# EAGLE board 13472-THAT_1206_Breakout-panel.v10 (EAGLE 7.5.0)
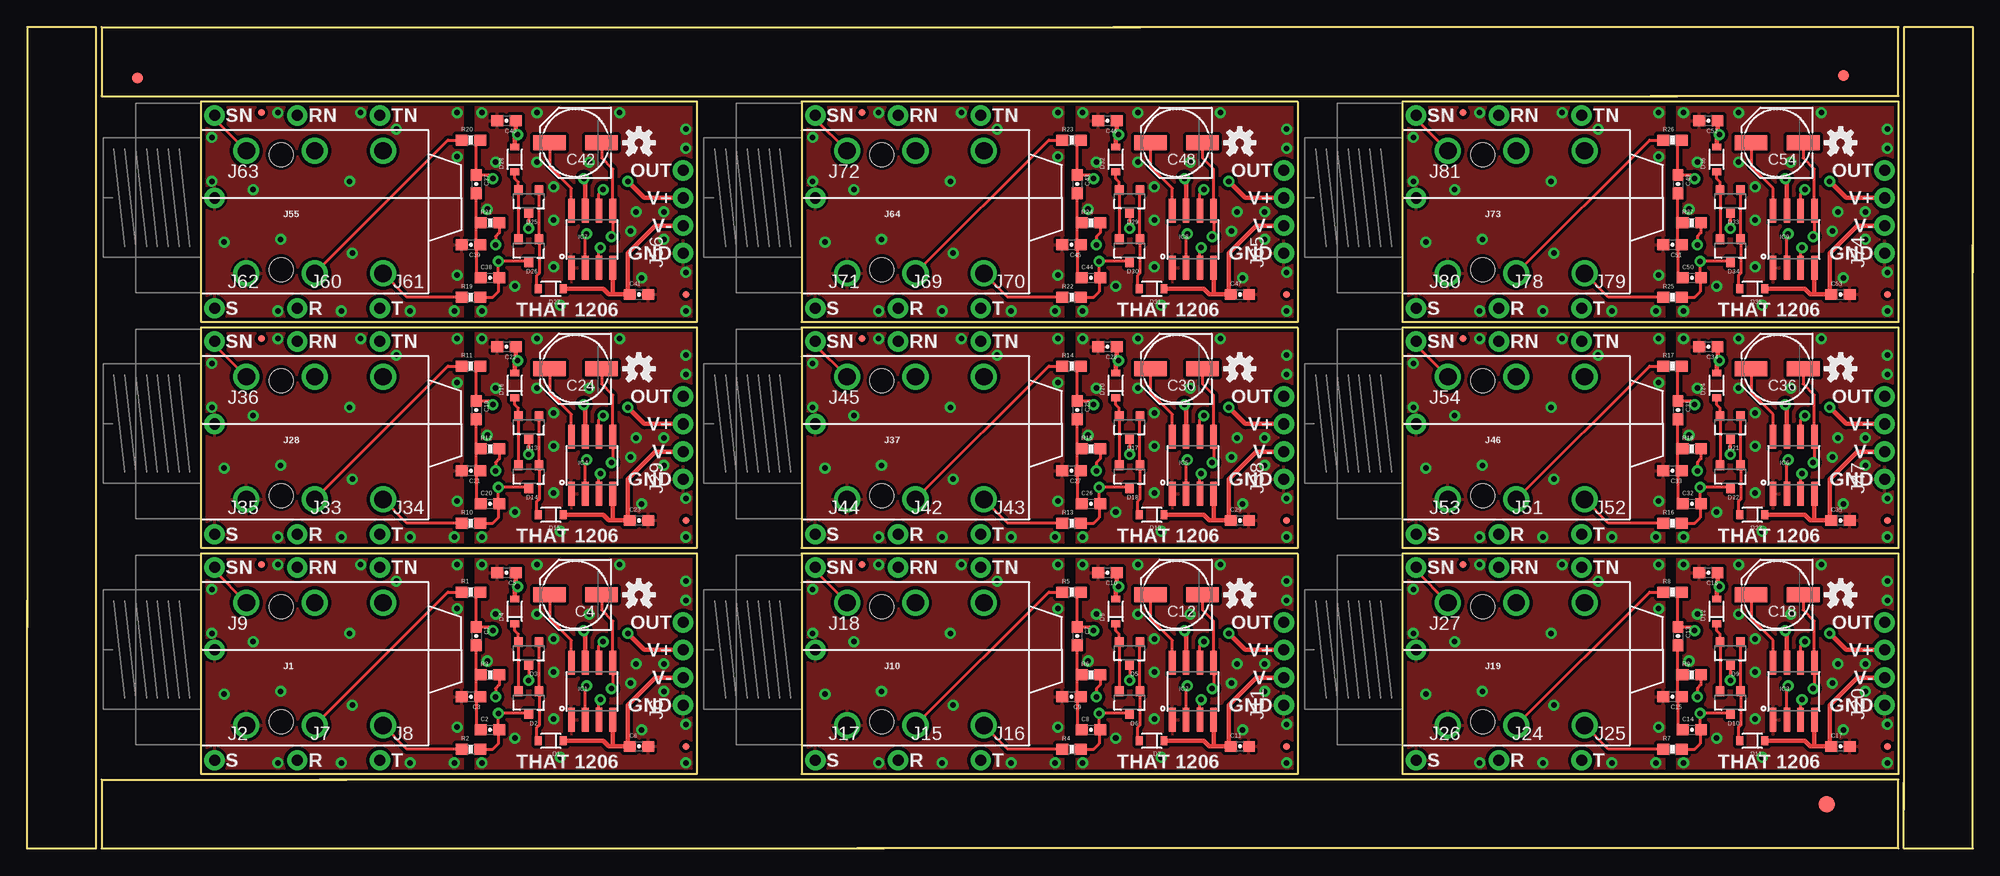
[diagram p0: board, top side]
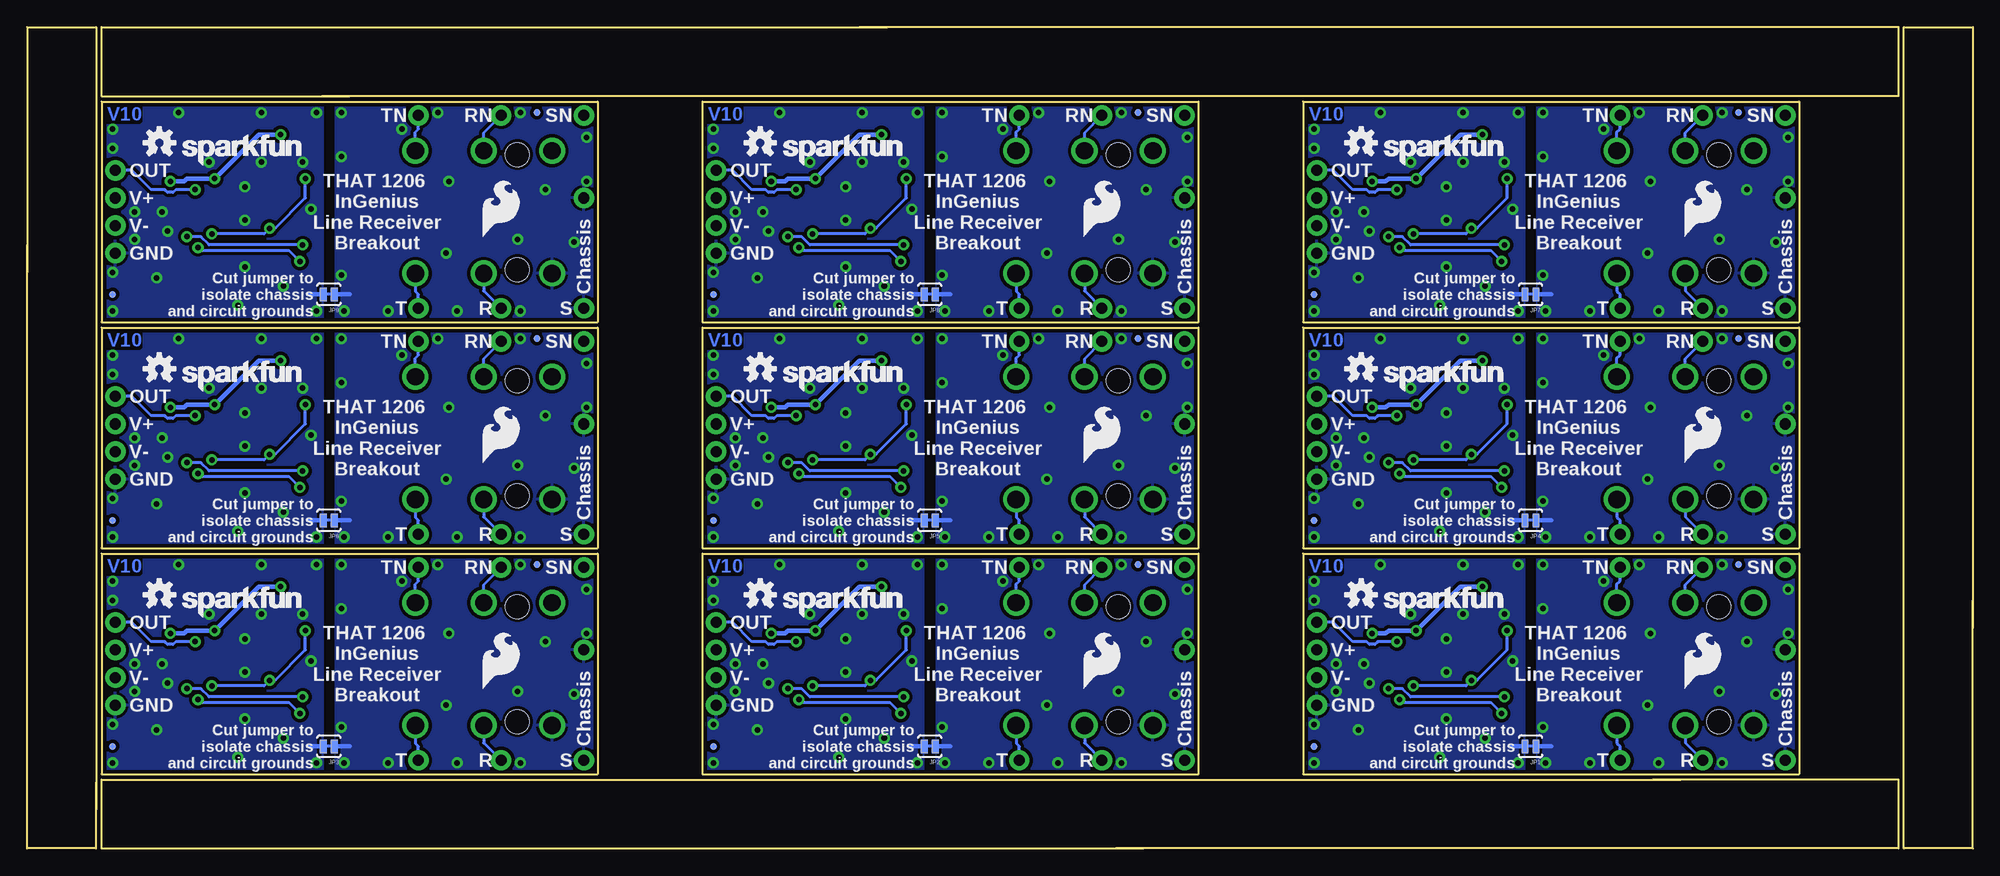
[diagram p1: board, bottom side, seen from below]

Size 179.32 x 75.69 mm. Coordinates in mm from the lower left corner, seen from the top.
Outline: 78.99,0 6.86,0 6.86,6.35 29.46,6.35
Outline: 26.92,6.35 172.47,6.35 172.47,0 76.45,0
Outline: 0,22.86 0,0 6.35,0 6.35,75.69 0,75.69 0,20.32
Outline: 172.97,3.56 172.97,75.69 179.32,75.69 179.32,53.09
Outline: 179.32,55.63 179.32,0 172.97,0 172.97,6.1
Outline: 100.08,75.69 172.47,75.69 172.47,69.34 149.61,69.34
Outline: 152.15,69.34 6.86,69.34 6.86,75.69 102.62,75.69
Outline: 61.72,27.18 16,27.18 16,6.86 61.72,6.86 61.72,27.18
Outline: 117.09,27.18 71.37,27.18 71.37,6.86 117.09,6.86 117.09,27.18
Outline: 172.47,27.18 126.75,27.18 126.75,6.86 172.47,6.86 172.47,27.18
Outline: 61.72,48.01 16,48.01 16,27.69 61.72,27.69 61.72,48.01
Outline: 117.09,48.01 71.37,48.01 71.37,27.69 117.09,27.69 117.09,48.01
Outline: 172.47,48.01 126.75,48.01 126.75,27.69 172.47,27.69 172.47,48.01
Outline: 61.72,68.83 16,68.83 16,48.51 61.72,48.51 61.72,68.83
Outline: 117.09,68.83 71.37,68.83 71.37,48.51 117.09,48.51 117.09,68.83
Outline: 172.47,68.83 126.75,68.83 126.75,48.51 172.47,48.51 172.47,68.83
Copper layers (1*16): Top 0.035mm / dielectric 1.5mm / Bottom 0.035mm
Design rules "SparkFun-2-layer-STANDARD": minimum track width 10mil, minimum drill 20mil, track to track 10mil, track to pad 8mil, pad to pad 8mil, via to via 10mil, smd to smd 8mil, copper to edge 8mil, drill to drill 8mil, minimum pad ring 10mil, minimum via ring 10mil, stop-mask expansion 4mil, vias tented up to drill 25mil, thermal gap 10mil
tRestrict: area 49.7,11.3 to 49.7,12.4; area 49.7,10.5 to 49.7,11.7; area 54.8,11.6 to 54.8,12.7; area 54.8,11.8 to 54.8,13; area 105.1,11.3 to 105.1,12.4; area 105.1,10.5 to 105.1,11.7; area 110.2,11.6 to 110.2,12.7; area 110.2,11.8 to 110.2,13; area 160.5,11.3 to 160.5,12.4; area 160.5,10.5 to 160.5,11.7; area 165.5,11.6 to 165.6,12.7; area 165.5,11.8 to 165.6,13; area 49.7,32.1 to 49.7,33.3; area 49.7,31.4 to 49.7,32.5; area 54.8,32.4 to 54.8,33.5; area 54.8,32.6 to 54.8,33.8; area 105.1,32.1 to 105.1,33.3; area 105.1,31.4 to 105.1,32.5; area 110.2,32.4 to 110.2,33.5; area 110.2,32.6 to 110.2,33.8; area 160.5,32.1 to 160.5,33.3; area 160.5,31.4 to 160.5,32.5; area 165.5,32.4 to 165.6,33.5; area 165.5,32.6 to 165.6,33.8; area 49.7,53 to 49.7,54.1; area 49.7,52.2 to 49.7,53.3; area 54.8,53.2 to 54.8,54.4; area 54.8,53.5 to 54.8,54.6; area 105.1,53 to 105.1,54.1; area 105.1,52.2 to 105.1,53.3; area 110.2,53.2 to 110.2,54.4; area 110.2,53.5 to 110.2,54.6; area 160.5,53 to 160.5,54.1; area 160.5,52.2 to 160.5,53.3; area 165.5,53.2 to 165.6,54.4; area 165.5,53.5 to 165.6,54.6

## Footprints (pad centres in the part's own frame; a part is rotated, then mirrored left to right if it is on the bottom)
0603-CAP = smd 1.1 x 1: 1 -0.85,0; 2 0.85,0
PANASONIC_D = smd 3 x 1.4: + 2.4,0; - -2.4,0
SOD-323 = smd 0.63 x 0.83: A 1.15,0; C -1.15,0
SOT23-3 = smd 0.8 x 0.9: 1 -0.95,-1; 2 0.95,-1; 3 0,1.1
FIDUCIAL-1.5X3 = smd 1.5 x 1.5: 1 0,0
FIDUCIAL-1X2 = smd 1 x 1: 1 0,0
MICRO-FIDUCIAL = smd 0.635 x 0.635: 1 0,0
SO08 = smd 0.61 x 2.21: 1 -1.905,-2.616; 2 -0.635,-2.616; 3 0.635,-2.616; 4 1.905,-2.616; 5 1.905,2.616; 6 0.635,2.616; 7 -0.635,2.616; 8 -1.905,2.616
AUDIO_JACK_0.25"_TRS_PTH_RA = drill 1.6: RING 10.5,-6.95; RING-NORM 10.5,4.35; SLEEVE 4.2,-6.95; SLEEVE-NORM 4.2,4.35; TIP 16.8,-6.95; TIP-NORM 16.8,4.35 | hole 2.2: 7.4,4; 7.4,-6.6
1X01_NO_SILK = drill 1.016 pad 1.88: 1 0,0
1X04_NO_SILK_ALL_ROUND = drill 1.016 pad 1.88: 1 0,0; 2 2.54,0; 3 5.08,0; 4 7.62,0
PAD-JUMPER-2-NC_BY_TRACE_YES_SILK = smd 0.635 x 1.27: 1 -0.508,0; 2 0.508,0
0603-RES = smd 1.1 x 1: 1 -0.85,0; 2 0.85,0

## Placement (x,y rotation side)
C1  470pF  [0603-CAP]  41.4,19.56 270 top
C2  470pF  [0603-CAP]  42.67,10.92 0 top
C3  100pF  [0603-CAP]  40.89,13.97 180 top
C4  220uf  [PANASONIC_D]  50.55,23.37 180 top
C5  0.1uF  [0603-CAP]  44.2,25.4 180 top
C6  0.1uF  [0603-CAP]  56.39,9.4 0 top
C7  470pF  [0603-CAP]  96.77,19.56 270 top
C8  470pF  [0603-CAP]  98.04,10.92 0 top
C9  100pF  [0603-CAP]  96.27,13.97 180 top
C10  0.1uF  [0603-CAP]  99.57,25.4 180 top
C11  0.1uF  [0603-CAP]  111.76,9.4 0 top
C12  220uf  [PANASONIC_D]  105.92,23.37 180 top
C13  470pF  [0603-CAP]  152.15,19.56 270 top
C14  470pF  [0603-CAP]  153.42,10.92 0 top
C15  100pF  [0603-CAP]  151.64,13.97 180 top
C16  0.1uF  [0603-CAP]  154.94,25.4 180 top
C17  0.1uF  [0603-CAP]  167.13,9.4 0 top
C18  220uf  [PANASONIC_D]  161.29,23.37 180 top
C19  470pF  [0603-CAP]  41.4,40.39 270 top
C20  470pF  [0603-CAP]  42.67,31.75 0 top
C21  100pF  [0603-CAP]  40.89,34.8 180 top
C22  0.1uF  [0603-CAP]  44.2,46.23 180 top
C23  0.1uF  [0603-CAP]  56.39,30.23 0 top
C24  220uf  [PANASONIC_D]  50.55,44.2 180 top
C25  470pF  [0603-CAP]  96.77,40.39 270 top
C26  470pF  [0603-CAP]  98.04,31.75 0 top
C27  100pF  [0603-CAP]  96.27,34.8 180 top
C28  0.1uF  [0603-CAP]  99.57,46.23 180 top
C29  0.1uF  [0603-CAP]  111.76,30.23 0 top
C30  220uf  [PANASONIC_D]  105.92,44.2 180 top
C31  470pF  [0603-CAP]  152.15,40.39 270 top
C32  470pF  [0603-CAP]  153.42,31.75 0 top
C33  100pF  [0603-CAP]  151.64,34.8 180 top
C34  0.1uF  [0603-CAP]  154.94,46.23 180 top
C35  0.1uF  [0603-CAP]  167.13,30.23 0 top
C36  220uf  [PANASONIC_D]  161.29,44.2 180 top
C37  470pF  [0603-CAP]  41.4,61.21 270 top
C38  470pF  [0603-CAP]  42.67,52.58 0 top
C39  100pF  [0603-CAP]  40.89,55.63 180 top
C40  0.1uF  [0603-CAP]  44.2,67.06 180 top
C41  0.1uF  [0603-CAP]  56.39,51.05 0 top
C42  220uf  [PANASONIC_D]  50.55,65.02 180 top
C43  470pF  [0603-CAP]  96.77,61.21 270 top
C44  470pF  [0603-CAP]  98.04,52.58 0 top
C45  100pF  [0603-CAP]  96.27,55.63 180 top
C46  0.1uF  [0603-CAP]  99.57,67.06 180 top
C47  0.1uF  [0603-CAP]  111.76,51.05 0 top
C48  220uf  [PANASONIC_D]  105.92,65.02 180 top
C49  470pF  [0603-CAP]  152.15,61.21 270 top
C50  470pF  [0603-CAP]  153.42,52.58 0 top
C51  100pF  [0603-CAP]  151.64,55.63 180 top
C52  0.1uF  [0603-CAP]  154.94,67.06 180 top
C53  0.1uF  [0603-CAP]  167.13,51.05 0 top
C54  220uf  [PANASONIC_D]  161.29,65.02 180 top
D1  12V  [SOD-323]  48.26,9.91 180 top
D2  BAV99  [SOT23-3]  46.23,13.48 180 top
D3  BAV99  [SOT23-3]  46.23,18.03 180 top
D4  12V  [SOD-323]  44.96,21.84 90 top
D5  BAV99  [SOT23-3]  101.6,18.03 180 top
D6  BAV99  [SOT23-3]  101.6,13.48 180 top
D7  12V  [SOD-323]  103.63,9.91 180 top
D8  12V  [SOD-323]  100.33,21.84 90 top
D9  BAV99  [SOT23-3]  156.97,18.03 180 top
D10  BAV99  [SOT23-3]  156.97,13.48 180 top
D11  12V  [SOD-323]  159,9.91 180 top
D12  12V  [SOD-323]  155.7,21.84 90 top
D13  BAV99  [SOT23-3]  46.23,38.86 180 top
D14  BAV99  [SOT23-3]  46.23,34.31 180 top
D15  12V  [SOD-323]  48.26,30.73 180 top
D16  12V  [SOD-323]  44.96,42.67 90 top
D17  BAV99  [SOT23-3]  101.6,38.86 180 top
D18  BAV99  [SOT23-3]  101.6,34.31 180 top
D19  12V  [SOD-323]  103.63,30.73 180 top
D20  12V  [SOD-323]  100.33,42.67 90 top
D21  BAV99  [SOT23-3]  156.97,38.86 180 top
D22  BAV99  [SOT23-3]  156.97,34.31 180 top
D23  12V  [SOD-323]  159,30.73 180 top
D24  12V  [SOD-323]  155.7,42.67 90 top
D25  BAV99  [SOT23-3]  46.23,59.69 180 top
D26  BAV99  [SOT23-3]  46.23,55.13 180 top
D27  12V  [SOD-323]  48.26,51.56 180 top
D28  12V  [SOD-323]  44.96,63.5 90 top
D29  BAV99  [SOT23-3]  101.6,59.69 180 top
D30  BAV99  [SOT23-3]  101.6,55.13 180 top
D31  12V  [SOD-323]  103.63,51.56 180 top
D32  12V  [SOD-323]  100.33,63.5 90 top
D33  BAV99  [SOT23-3]  156.97,59.69 180 top
D34  BAV99  [SOT23-3]  156.97,55.13 180 top
D35  12V  [SOD-323]  159,51.56 180 top
D36  12V  [SOD-323]  155.7,63.5 90 top
E$1  [FIDUCIAL-1.5X3]  165.86,4.06 0 top
E$7  [FIDUCIAL-1X2]  167.39,71.25 90 top
E$8  [FIDUCIAL-1X2]  10.16,70.99 270 top
FD1  FIDUCIALUFIDUCIAL  [MICRO-FIDUCIAL]  21.59,26.16 0 bottom
FD2  FIDUCIALUFIDUCIAL  [MICRO-FIDUCIAL]  60.71,9.4 0 bottom
FD3  FIDUCIALUFIDUCIAL  [MICRO-FIDUCIAL]  21.59,26.16 0 top
FD4  FIDUCIALUFIDUCIAL  [MICRO-FIDUCIAL]  60.71,9.4 0 top
FD5  FIDUCIALUFIDUCIAL  [MICRO-FIDUCIAL]  76.96,26.16 0 top
FD6  FIDUCIALUFIDUCIAL  [MICRO-FIDUCIAL]  116.08,9.4 0 top
FD7  FIDUCIALUFIDUCIAL  [MICRO-FIDUCIAL]  76.96,26.16 0 bottom
FD8  FIDUCIALUFIDUCIAL  [MICRO-FIDUCIAL]  116.08,9.4 0 bottom
FD9  FIDUCIALUFIDUCIAL  [MICRO-FIDUCIAL]  132.33,26.16 0 top
FD10  FIDUCIALUFIDUCIAL  [MICRO-FIDUCIAL]  171.45,9.4 0 top
FD11  FIDUCIALUFIDUCIAL  [MICRO-FIDUCIAL]  132.33,26.16 0 bottom
FD12  FIDUCIALUFIDUCIAL  [MICRO-FIDUCIAL]  171.45,9.4 0 bottom
FD13  FIDUCIALUFIDUCIAL  [MICRO-FIDUCIAL]  21.59,46.99 0 top
FD14  FIDUCIALUFIDUCIAL  [MICRO-FIDUCIAL]  60.71,30.23 0 top
FD15  FIDUCIALUFIDUCIAL  [MICRO-FIDUCIAL]  21.59,46.99 0 bottom
FD16  FIDUCIALUFIDUCIAL  [MICRO-FIDUCIAL]  60.71,30.23 0 bottom
FD17  FIDUCIALUFIDUCIAL  [MICRO-FIDUCIAL]  76.96,46.99 0 top
FD18  FIDUCIALUFIDUCIAL  [MICRO-FIDUCIAL]  116.08,30.23 0 top
FD19  FIDUCIALUFIDUCIAL  [MICRO-FIDUCIAL]  76.96,46.99 0 bottom
FD20  FIDUCIALUFIDUCIAL  [MICRO-FIDUCIAL]  116.08,30.23 0 bottom
FD21  FIDUCIALUFIDUCIAL  [MICRO-FIDUCIAL]  132.33,46.99 0 top
FD22  FIDUCIALUFIDUCIAL  [MICRO-FIDUCIAL]  171.45,30.23 0 top
FD23  FIDUCIALUFIDUCIAL  [MICRO-FIDUCIAL]  132.33,46.99 0 bottom
FD24  FIDUCIALUFIDUCIAL  [MICRO-FIDUCIAL]  171.45,30.23 0 bottom
FD25  FIDUCIALUFIDUCIAL  [MICRO-FIDUCIAL]  21.59,67.82 0 top
FD26  FIDUCIALUFIDUCIAL  [MICRO-FIDUCIAL]  60.71,51.05 0 top
FD27  FIDUCIALUFIDUCIAL  [MICRO-FIDUCIAL]  21.59,67.82 0 bottom
FD28  FIDUCIALUFIDUCIAL  [MICRO-FIDUCIAL]  60.71,51.05 0 bottom
FD29  FIDUCIALUFIDUCIAL  [MICRO-FIDUCIAL]  76.96,67.82 0 top
FD30  FIDUCIALUFIDUCIAL  [MICRO-FIDUCIAL]  116.08,51.05 0 top
FD31  FIDUCIALUFIDUCIAL  [MICRO-FIDUCIAL]  76.96,67.82 0 bottom
FD32  FIDUCIALUFIDUCIAL  [MICRO-FIDUCIAL]  116.08,51.05 0 bottom
FD33  FIDUCIALUFIDUCIAL  [MICRO-FIDUCIAL]  132.33,67.82 0 top
FD34  FIDUCIALUFIDUCIAL  [MICRO-FIDUCIAL]  171.45,51.05 0 top
FD35  FIDUCIALUFIDUCIAL  [MICRO-FIDUCIAL]  132.33,67.82 0 bottom
FD36  FIDUCIALUFIDUCIAL  [MICRO-FIDUCIAL]  171.45,51.05 0 bottom
IC1  THAT1206  [SO08]  52.07,14.48 0 top
IC2  THAT1206  [SO08]  107.44,14.48 0 top
IC3  THAT1206  [SO08]  162.81,14.48 0 top
IC4  THAT1206  [SO08]  52.07,35.31 0 top
IC5  THAT1206  [SO08]  107.44,35.31 0 top
IC6  THAT1206  [SO08]  162.81,35.31 0 top
IC7  THAT1206  [SO08]  52.07,56.13 0 top
IC8  THAT1206  [SO08]  107.44,56.13 0 top
IC9  THAT1206  [SO08]  162.81,56.13 0 top
J1  INPUT  [AUDIO_JACK_0.25"_TRS_PTH_RA]  16,18.29 0 top
J2  S  [1X01_NO_SILK]  17.27,8.13 0 top
J3  RN  [1X01_NO_SILK]  24.89,25.91 0 top
J4  TN  [1X01_NO_SILK]  32.51,25.91 0 top
J5  SN  [1X01_NO_SILK]  17.27,25.91 0 top
J6  1x4  [1X04_NO_SILK_ALL_ROUND]  60.45,13.21 90 top
J7  R  [1X01_NO_SILK]  24.89,8.13 0 top
J8  T  [1X01_NO_SILK]  32.51,8.13 0 top
J9  Chassis  [1X01_NO_SILK]  17.27,18.29 0 top
J10  INPUT  [AUDIO_JACK_0.25"_TRS_PTH_RA]  71.37,18.29 0 top
J11  1x4  [1X04_NO_SILK_ALL_ROUND]  115.82,13.21 90 top
J12  RN  [1X01_NO_SILK]  80.26,25.91 0 top
J13  TN  [1X01_NO_SILK]  87.88,25.91 0 top
J14  SN  [1X01_NO_SILK]  72.64,25.91 0 top
J15  R  [1X01_NO_SILK]  80.26,8.13 0 top
J16  T  [1X01_NO_SILK]  87.88,8.13 0 top
J17  S  [1X01_NO_SILK]  72.64,8.13 0 top
J18  Chassis  [1X01_NO_SILK]  72.64,18.29 0 top
J19  INPUT  [AUDIO_JACK_0.25"_TRS_PTH_RA]  126.75,18.29 0 top
J20  1x4  [1X04_NO_SILK_ALL_ROUND]  171.2,13.21 90 top
J21  RN  [1X01_NO_SILK]  135.64,25.91 0 top
J22  TN  [1X01_NO_SILK]  143.26,25.91 0 top
J23  SN  [1X01_NO_SILK]  128.02,25.91 0 top
J24  R  [1X01_NO_SILK]  135.64,8.13 0 top
J25  T  [1X01_NO_SILK]  143.26,8.13 0 top
J26  S  [1X01_NO_SILK]  128.02,8.13 0 top
J27  Chassis  [1X01_NO_SILK]  128.02,18.29 0 top
J28  INPUT  [AUDIO_JACK_0.25"_TRS_PTH_RA]  16,39.12 0 top
J29  1x4  [1X04_NO_SILK_ALL_ROUND]  60.45,34.04 90 top
J30  RN  [1X01_NO_SILK]  24.89,46.74 0 top
J31  TN  [1X01_NO_SILK]  32.51,46.74 0 top
J32  SN  [1X01_NO_SILK]  17.27,46.74 0 top
J33  R  [1X01_NO_SILK]  24.89,28.96 0 top
J34  T  [1X01_NO_SILK]  32.51,28.96 0 top
J35  S  [1X01_NO_SILK]  17.27,28.96 0 top
J36  Chassis  [1X01_NO_SILK]  17.27,39.12 0 top
J37  INPUT  [AUDIO_JACK_0.25"_TRS_PTH_RA]  71.37,39.12 0 top
J38  1x4  [1X04_NO_SILK_ALL_ROUND]  115.82,34.04 90 top
J39  RN  [1X01_NO_SILK]  80.26,46.74 0 top
J40  TN  [1X01_NO_SILK]  87.88,46.74 0 top
J41  SN  [1X01_NO_SILK]  72.64,46.74 0 top
J42  R  [1X01_NO_SILK]  80.26,28.96 0 top
J43  T  [1X01_NO_SILK]  87.88,28.96 0 top
J44  S  [1X01_NO_SILK]  72.64,28.96 0 top
J45  Chassis  [1X01_NO_SILK]  72.64,39.12 0 top
J46  INPUT  [AUDIO_JACK_0.25"_TRS_PTH_RA]  126.75,39.12 0 top
J47  1x4  [1X04_NO_SILK_ALL_ROUND]  171.2,34.04 90 top
J48  RN  [1X01_NO_SILK]  135.64,46.74 0 top
J49  TN  [1X01_NO_SILK]  143.26,46.74 0 top
J50  SN  [1X01_NO_SILK]  128.02,46.74 0 top
J51  R  [1X01_NO_SILK]  135.64,28.96 0 top
J52  T  [1X01_NO_SILK]  143.26,28.96 0 top
J53  S  [1X01_NO_SILK]  128.02,28.96 0 top
J54  Chassis  [1X01_NO_SILK]  128.02,39.12 0 top
J55  INPUT  [AUDIO_JACK_0.25"_TRS_PTH_RA]  16,59.94 0 top
J56  1x4  [1X04_NO_SILK_ALL_ROUND]  60.45,54.86 90 top
J57  RN  [1X01_NO_SILK]  24.89,67.56 0 top
J58  TN  [1X01_NO_SILK]  32.51,67.56 0 top
J59  SN  [1X01_NO_SILK]  17.27,67.56 0 top
J60  R  [1X01_NO_SILK]  24.89,49.78 0 top
J61  T  [1X01_NO_SILK]  32.51,49.78 0 top
J62  S  [1X01_NO_SILK]  17.27,49.78 0 top
J63  Chassis  [1X01_NO_SILK]  17.27,59.94 0 top
J64  INPUT  [AUDIO_JACK_0.25"_TRS_PTH_RA]  71.37,59.94 0 top
J65  1x4  [1X04_NO_SILK_ALL_ROUND]  115.82,54.86 90 top
J66  RN  [1X01_NO_SILK]  80.26,67.56 0 top
J67  TN  [1X01_NO_SILK]  87.88,67.56 0 top
J68  SN  [1X01_NO_SILK]  72.64,67.56 0 top
J69  R  [1X01_NO_SILK]  80.26,49.78 0 top
J70  T  [1X01_NO_SILK]  87.88,49.78 0 top
J71  S  [1X01_NO_SILK]  72.64,49.78 0 top
J72  Chassis  [1X01_NO_SILK]  72.64,59.94 0 top
J73  INPUT  [AUDIO_JACK_0.25"_TRS_PTH_RA]  126.75,59.94 0 top
J74  1x4  [1X04_NO_SILK_ALL_ROUND]  171.2,54.86 90 top
J75  RN  [1X01_NO_SILK]  135.64,67.56 0 top
J76  TN  [1X01_NO_SILK]  143.26,67.56 0 top
J77  SN  [1X01_NO_SILK]  128.02,67.56 0 top
J78  R  [1X01_NO_SILK]  135.64,49.78 0 top
J79  T  [1X01_NO_SILK]  143.26,49.78 0 top
J80  S  [1X01_NO_SILK]  128.02,49.78 0 top
J81  Chassis  [1X01_NO_SILK]  128.02,59.94 0 top
JP1  GND-JOIN  [PAD-JUMPER-2-NC_BY_TRACE_YES_SILK]  40.77,9.4 180 bottom
JP2  GND-JOIN  [PAD-JUMPER-2-NC_BY_TRACE_YES_SILK]  96.14,9.4 180 bottom
JP3  GND-JOIN  [PAD-JUMPER-2-NC_BY_TRACE_YES_SILK]  151.51,9.4 180 bottom
JP4  GND-JOIN  [PAD-JUMPER-2-NC_BY_TRACE_YES_SILK]  40.77,30.23 180 bottom
JP5  GND-JOIN  [PAD-JUMPER-2-NC_BY_TRACE_YES_SILK]  96.14,30.23 180 bottom
JP6  GND-JOIN  [PAD-JUMPER-2-NC_BY_TRACE_YES_SILK]  151.51,30.23 180 bottom
JP7  GND-JOIN  [PAD-JUMPER-2-NC_BY_TRACE_YES_SILK]  40.77,51.05 180 bottom
JP8  GND-JOIN  [PAD-JUMPER-2-NC_BY_TRACE_YES_SILK]  96.14,51.05 180 bottom
JP9  GND-JOIN  [PAD-JUMPER-2-NC_BY_TRACE_YES_SILK]  151.51,51.05 180 bottom
LOGO1  OSHW-LOGOS  [OSHW-LOGO-S]  111.76,23.37 0 bottom
LOGO2  SFE_LOGO_FLAME.2_INCH  [SFE_LOGO_FLAME_.2]  26.92,14.48 0 bottom
LOGO3  OSHW-LOGOS  [OSHW-LOGO-S]  56.39,23.37 0 bottom
LOGO4  OSHW-LOGOS  [OSHW-LOGO-S]  56.39,23.37 0 top
LOGO5  SFE_LOGO_NAME.1_INCH  [SFE_LOGO_NAME_.1]  54.74,20.83 0 bottom
LOGO6  OSHW-LOGOS  [OSHW-LOGO-S]  111.76,23.37 0 top
LOGO7  SFE_LOGO_FLAME.2_INCH  [SFE_LOGO_FLAME_.2]  82.3,14.48 0 bottom
LOGO8  SFE_LOGO_NAME.1_INCH  [SFE_LOGO_NAME_.1]  110.11,20.83 0 bottom
LOGO9  OSHW-LOGOS  [OSHW-LOGO-S]  167.13,23.37 0 bottom
LOGO10  OSHW-LOGOS  [OSHW-LOGO-S]  167.13,23.37 0 top
LOGO11  SFE_LOGO_FLAME.2_INCH  [SFE_LOGO_FLAME_.2]  137.67,14.48 0 bottom
LOGO12  SFE_LOGO_NAME.1_INCH  [SFE_LOGO_NAME_.1]  165.48,20.83 0 bottom
LOGO13  OSHW-LOGOS  [OSHW-LOGO-S]  56.39,44.2 0 bottom
LOGO14  OSHW-LOGOS  [OSHW-LOGO-S]  56.39,44.2 0 top
LOGO15  SFE_LOGO_FLAME.2_INCH  [SFE_LOGO_FLAME_.2]  26.92,35.31 0 bottom
LOGO16  SFE_LOGO_NAME.1_INCH  [SFE_LOGO_NAME_.1]  54.74,41.66 0 bottom
LOGO17  OSHW-LOGOS  [OSHW-LOGO-S]  111.76,44.2 0 bottom
LOGO18  OSHW-LOGOS  [OSHW-LOGO-S]  111.76,44.2 0 top
LOGO19  SFE_LOGO_FLAME.2_INCH  [SFE_LOGO_FLAME_.2]  82.3,35.31 0 bottom
LOGO20  SFE_LOGO_NAME.1_INCH  [SFE_LOGO_NAME_.1]  110.11,41.66 0 bottom
LOGO21  OSHW-LOGOS  [OSHW-LOGO-S]  167.13,44.2 0 bottom
LOGO22  OSHW-LOGOS  [OSHW-LOGO-S]  167.13,44.2 0 top
LOGO23  SFE_LOGO_FLAME.2_INCH  [SFE_LOGO_FLAME_.2]  137.67,35.31 0 bottom
LOGO24  SFE_LOGO_NAME.1_INCH  [SFE_LOGO_NAME_.1]  165.48,41.66 0 bottom
LOGO25  OSHW-LOGOS  [OSHW-LOGO-S]  56.39,65.02 0 bottom
LOGO26  OSHW-LOGOS  [OSHW-LOGO-S]  56.39,65.02 0 top
LOGO27  SFE_LOGO_FLAME.2_INCH  [SFE_LOGO_FLAME_.2]  26.92,56.13 0 bottom
LOGO28  SFE_LOGO_NAME.1_INCH  [SFE_LOGO_NAME_.1]  54.74,62.48 0 bottom
LOGO29  OSHW-LOGOS  [OSHW-LOGO-S]  111.76,65.02 0 bottom
LOGO30  OSHW-LOGOS  [OSHW-LOGO-S]  111.76,65.02 0 top
LOGO31  SFE_LOGO_FLAME.2_INCH  [SFE_LOGO_FLAME_.2]  82.3,56.13 0 bottom
LOGO32  SFE_LOGO_NAME.1_INCH  [SFE_LOGO_NAME_.1]  110.11,62.48 0 bottom
LOGO33  OSHW-LOGOS  [OSHW-LOGO-S]  167.13,65.02 0 bottom
LOGO34  OSHW-LOGOS  [OSHW-LOGO-S]  167.13,65.02 0 top
LOGO35  SFE_LOGO_FLAME.2_INCH  [SFE_LOGO_FLAME_.2]  137.67,56.13 0 bottom
LOGO36  SFE_LOGO_NAME.1_INCH  [SFE_LOGO_NAME_.1]  165.48,62.48 0 bottom
R1  100  [0603-RES]  40.89,23.62 0 top
R2  100  [0603-RES]  40.89,9.14 0 top
R3  4.7K  [0603-RES]  42.67,16 0 top
R4  100  [0603-RES]  96.27,9.14 0 top
R5  100  [0603-RES]  96.27,23.62 0 top
R6  4.7K  [0603-RES]  98.04,16 0 top
R7  100  [0603-RES]  151.64,9.14 0 top
R8  100  [0603-RES]  151.64,23.62 0 top
R9  4.7K  [0603-RES]  153.42,16 0 top
R10  100  [0603-RES]  40.89,29.97 0 top
R11  100  [0603-RES]  40.89,44.45 0 top
R12  4.7K  [0603-RES]  42.67,36.83 0 top
R13  100  [0603-RES]  96.27,29.97 0 top
R14  100  [0603-RES]  96.27,44.45 0 top
R15  4.7K  [0603-RES]  98.04,36.83 0 top
R16  100  [0603-RES]  151.64,29.97 0 top
R17  100  [0603-RES]  151.64,44.45 0 top
R18  4.7K  [0603-RES]  153.42,36.83 0 top
R19  100  [0603-RES]  40.89,50.8 0 top
R20  100  [0603-RES]  40.89,65.28 0 top
R21  4.7K  [0603-RES]  42.67,57.66 0 top
R22  100  [0603-RES]  96.27,50.8 0 top
R23  100  [0603-RES]  96.27,65.28 0 top
R24  4.7K  [0603-RES]  98.04,57.66 0 top
R25  100  [0603-RES]  151.64,50.8 0 top
R26  100  [0603-RES]  151.64,65.28 0 top
R27  4.7K  [0603-RES]  153.42,57.66 0 top

## Library data of the parts
C1 C2 C7 C8 C13 C14 C19 C20 C25 C26 C31 C32 C37 C38 C43 C44 C49 C50 = SparkFun-Capacitors; PROD_ID: CAP-07884
C3 C9 C15 C21 C27 C33 C39 C45 C51 = SparkFun-Capacitors; PROD_ID: CAP-07883
C4 C12 C18 C24 C30 C36 C42 C48 C54 = that-ics; PROD_ID: CAP-13470
C5 C6 C10 C11 C16 C17 C22 C23 C28 C29 C34 C35 C40 C41 C46 C47 C52 C53 = SparkFun-Capacitors; PROD_ID: CAP-08604
D1 D4 D7 D8 D11 D12 D15 D16 D19 D20 D23 D24 D27 D28 D31 D32 D35 D36 = that-ics; DK_PN: MM3Z12VT1GOSCT-ND; MFR: ON Semi; MFR_PN: MM3Z12VT1G; PROD_ID: DIO-13471
D2 D3 D5 D6 D9 D10 D13 D14 D17 D18 D21 D22 D25 D26 D29 D30 D33 D34 = SparkFun-DiscreteSemi; PROD_ID: DIO-10647
E$1 = SparkFun-Retired
E$7 E$8 FD1-FD36 LOGO1-LOGO36 = SparkFun-Aesthetics
IC1-IC9 = that-ics; PROD_ID: IC-13469
J1 J10 J19 J28 J37 J46 J55 J64 J73 = SparkFun-Connectors; PROD_ID: CONN-12339; SF_ID: COM-11144
J2-J5 J7-J9 J12-J18 J21-J27 J30-J36 J39-J45 J48-J54 J57-J63 J66-J72 J75-J81 = SparkFun-Connectors
J6 J11 J20 J29 J38 J47 J56 J65 J74 = SparkFun-Connectors; PROD_ID: CONN-09696
JP1-JP9 = SparkFun-Passives
R1 R2 R4 R5 R7 R8 R10 R11 R13 R14 R16 R17 R19 R20 R22 R23 R25 R26 = SparkFun-Resistors; PROD_ID: RES-07863
R3 R6 R9 R12 R15 R18 R21 R24 R27 = SparkFun-Resistors; PROD_ID: RES-07857

## Nets
GND: C5.2 C6.2 IC1.1 J6.1 JP1.2
GND1: C10.2 C11.2 IC2.1 J11.1 JP2.2
GND2: C16.2 C17.2 IC3.1 J20.1 JP3.2
GND3: C22.2 C23.2 IC4.1 J29.1 JP4.2
GND4: C28.2 C29.2 IC5.1 J38.1 JP5.2
GND5: C34.2 C35.2 IC6.1 J47.1 JP6.2
GND6: C40.2 C41.2 IC7.1 J56.1 JP7.2
GND7: C46.2 C47.2 IC8.1 J65.1 JP8.2
GND8: C52.2 C53.2 IC9.1 J74.1 JP9.2
GND-ISO: C3.2 J1.SLEEVE J2.1 J9.1 JP1.1
GND-ISO1: C9.2 J10.SLEEVE J17.1 J18.1 JP2.1
GND-ISO2: C15.2 J19.SLEEVE J26.1 J27.1 JP3.1
GND-ISO3: C21.2 J28.SLEEVE J35.1 J36.1 JP4.1
GND-ISO4: C27.2 J37.SLEEVE J44.1 J45.1 JP5.1
GND-ISO5: C33.2 J46.SLEEVE J53.1 J54.1 JP6.1
GND-ISO6: C39.2 J55.SLEEVE J62.1 J63.1 JP7.1
GND-ISO7: C45.2 J64.SLEEVE J71.1 J72.1 JP8.1
GND-ISO8: C51.2 J73.SLEEVE J80.1 J81.1 JP9.1
N$1: J1.RING J7.1 R1.1
N$2: C1.1 D3.3 IC1.2 R1.2
N$3: J1.TIP J8.1 R2.1
N$4: C2.2 D2.3 IC1.3 R2.2
N$5: C1.2 C2.1 C3.1 R3.1
N$6: C4.- IC1.5 R3.2
N$7: C4.+ IC1.8
N$8: J1.SLEEVE-NORM J5.1
N$9: J1.TIP-NORM J4.1
N$10: J1.RING-NORM J3.1
N$11: J10.RING J15.1 R5.1
N$12: D1.A D2.1 D3.1
N$13: C7.1 D5.3 IC2.2 R5.2
N$14: J10.TIP J16.1 R4.1
N$15: D2.2 D3.2 D4.C
N$16: C8.2 D6.3 IC2.3 R4.2
N$17: C7.2 C8.1 C9.1 R6.1
N$18: C12.- IC2.5 R6.2
N$19: C12.+ IC2.8
N$20: D5.1 D6.1 D7.A
N$21: D5.2 D6.2 D8.C
N$22: J10.SLEEVE-NORM J14.1
N$23: J10.TIP-NORM J13.1
N$24: J10.RING-NORM J12.1
N$25: J19.RING J24.1 R8.1
N$26: C13.1 D9.3 IC3.2 R8.2
N$27: J19.TIP J25.1 R7.1
N$28: C14.2 D10.3 IC3.3 R7.2
N$29: C13.2 C14.1 C15.1 R9.1
N$30: C18.- IC3.5 R9.2
N$31: C18.+ IC3.8
N$32: D9.1 D10.1 D11.A
N$33: D9.2 D10.2 D12.C
N$34: J19.SLEEVE-NORM J23.1
N$35: J19.TIP-NORM J22.1
N$36: J19.RING-NORM J21.1
N$37: J28.RING J33.1 R11.1
N$38: C19.1 D13.3 IC4.2 R11.2
N$39: J28.TIP J34.1 R10.1
N$40: C20.2 D14.3 IC4.3 R10.2
N$41: C19.2 C20.1 C21.1 R12.1
N$42: C24.- IC4.5 R12.2
N$43: C24.+ IC4.8
N$44: D13.1 D14.1 D15.A
N$45: D13.2 D14.2 D16.C
N$46: J28.SLEEVE-NORM J32.1
N$47: J28.TIP-NORM J31.1
N$48: J28.RING-NORM J30.1
N$49: J37.RING J42.1 R14.1
N$50: C25.1 D17.3 IC5.2 R14.2
N$51: J37.TIP J43.1 R13.1
N$52: C26.2 D18.3 IC5.3 R13.2
N$53: C25.2 C26.1 C27.1 R15.1
N$54: C30.- IC5.5 R15.2
N$55: C30.+ IC5.8
N$56: D17.1 D18.1 D19.A
N$57: D17.2 D18.2 D20.C
N$58: J37.SLEEVE-NORM J41.1
N$59: J37.TIP-NORM J40.1
N$60: J37.RING-NORM J39.1
N$61: J46.RING J51.1 R17.1
N$62: C31.1 D21.3 IC6.2 R17.2
N$63: J46.TIP J52.1 R16.1
N$64: C32.2 D22.3 IC6.3 R16.2
N$65: C31.2 C32.1 C33.1 R18.1
N$66: C36.- IC6.5 R18.2
N$67: C36.+ IC6.8
N$68: D21.1 D22.1 D23.A
N$69: D21.2 D22.2 D24.C
N$70: J46.SLEEVE-NORM J50.1
N$71: J46.TIP-NORM J49.1
N$72: J46.RING-NORM J48.1
N$73: J55.RING J60.1 R20.1
N$74: C37.1 D25.3 IC7.2 R20.2
N$75: J55.TIP J61.1 R19.1
N$76: C38.2 D26.3 IC7.3 R19.2
N$77: C37.2 C38.1 C39.1 R21.1
N$78: C42.- IC7.5 R21.2
N$79: C42.+ IC7.8
N$80: D25.1 D26.1 D27.A
N$81: D25.2 D26.2 D28.C
N$82: J55.SLEEVE-NORM J59.1
N$83: J55.TIP-NORM J58.1
N$84: J55.RING-NORM J57.1
N$85: J64.RING J69.1 R23.1
N$86: C43.1 D29.3 IC8.2 R23.2
N$87: J64.TIP J70.1 R22.1
N$88: C44.2 D30.3 IC8.3 R22.2
N$89: C43.2 C44.1 C45.1 R24.1
N$90: C48.- IC8.5 R24.2
N$91: C48.+ IC8.8
N$92: D29.1 D30.1 D31.A
N$93: D29.2 D30.2 D32.C
N$94: J64.SLEEVE-NORM J68.1
N$95: J64.TIP-NORM J67.1
N$96: J64.RING-NORM J66.1
N$97: J73.RING J78.1 R26.1
N$98: C49.1 D33.3 IC9.2 R26.2
N$99: J73.TIP J79.1 R25.1
N$100: C50.2 D34.3 IC9.3 R25.2
N$101: C49.2 C50.1 C51.1 R27.1
N$102: C54.- IC9.5 R27.2
N$103: C54.+ IC9.8
N$104: D33.1 D34.1 D35.A
N$105: D33.2 D34.2 D36.C
N$106: J73.SLEEVE-NORM J77.1
N$107: J73.TIP-NORM J76.1
N$108: J73.RING-NORM J75.1
RCV: IC1.6 J6.4
RCV1: IC2.6 J11.4
RCV2: IC3.6 J20.4
RCV3: IC4.6 J29.4
RCV4: IC5.6 J38.4
RCV5: IC6.6 J47.4
RCV6: IC7.6 J56.4
RCV7: IC8.6 J65.4
RCV8: IC9.6 J74.4
VCC: C5.1 D4.A IC1.7 J6.3
VCC1: C10.1 D8.A IC2.7 J11.3
VCC2: C16.1 D12.A IC3.7 J20.3
VCC3: C22.1 D16.A IC4.7 J29.3
VCC4: C28.1 D20.A IC5.7 J38.3
VCC5: C34.1 D24.A IC6.7 J47.3
VCC6: C40.1 D28.A IC7.7 J56.3
VCC7: C46.1 D32.A IC8.7 J65.3
VCC8: C52.1 D36.A IC9.7 J74.3
VNEG: C6.1 D1.C IC1.4 J6.2
VNEG1: C11.1 D7.C IC2.4 J11.2
VNEG2: C17.1 D11.C IC3.4 J20.2
VNEG3: C23.1 D15.C IC4.4 J29.2
VNEG4: C29.1 D19.C IC5.4 J38.2
VNEG5: C35.1 D23.C IC6.4 J47.2
VNEG6: C41.1 D27.C IC7.4 J56.2
VNEG7: C47.1 D31.C IC8.4 J65.2
VNEG8: C53.1 D35.C IC9.4 J74.2

## Tracks (layer width: path | path; a pad name or v marks a point on that pad's centre or on a via)
GND  (via drill 0.51)
  Bottom 0.406: JP1.2 42.67,9.4
  other vias: 60.71,7.87 58.67,17.02 56.13,17.02 60.71,11.43 58.67,14.48 55.63,15.24 60.71,22.86 60.71,24.64 54.61,26.16 46.99,26.16 41.91,26.16 43.18,21.59 46.99,21.59 48.51,19.3 48.51,16.26 44.96,10.16 41.91,7.87 56.64,10.92 51.82,21.59 42.42,17.27 48.51,11.94 49.15,8.38
  pour Top (isolate 0.305): 61.72,27.18 61.72,6.86 41.4,6.86 41.4,27.18
  pour Bottom (isolate 0.305): 41.4,27.18 41.4,6.86 61.72,6.86 61.72,27.18
GND1  (via drill 0.51)
  Bottom 0.406: JP2.2 98.04,9.4
  other vias: 116.08,7.87 114.05,17.02 111.51,17.02 116.08,11.43 114.05,14.48 111,15.24 116.08,22.86 116.08,24.64 109.98,26.16 102.36,26.16 97.28,26.16 98.55,21.59 102.36,21.59 103.89,19.3 103.89,16.26 100.33,10.16 97.28,7.87 112.01,10.92 107.19,21.59 97.79,17.27 103.89,11.94 104.52,8.38
  pour Top (isolate 0.305): 117.09,27.18 117.09,6.86 96.77,6.86 96.77,27.18
  pour Bottom (isolate 0.305): 96.77,27.18 96.77,6.86 117.09,6.86 117.09,27.18
GND2  (via drill 0.51)
  Bottom 0.406: JP3.2 153.42,9.4
  other vias: 171.45,7.87 169.42,17.02 166.88,17.02 171.45,11.43 169.42,14.48 166.37,15.24 171.45,22.86 171.45,24.64 165.35,26.16 157.73,26.16 152.65,26.16 153.92,21.59 157.73,21.59 159.26,19.3 159.26,16.26 155.7,10.16 152.65,7.87 167.39,10.92 162.56,21.59 153.16,17.27 159.26,11.94 159.89,8.38
  pour Top (isolate 0.305): 172.47,27.18 172.47,6.86 152.15,6.86 152.15,27.18
  pour Bottom (isolate 0.305): 152.15,27.18 152.15,6.86 172.47,6.86 172.47,27.18
GND3  (via drill 0.51)
  Bottom 0.406: JP4.2 42.67,30.23
  other vias: 60.71,28.7 58.67,37.85 56.13,37.85 60.71,32.26 58.67,35.31 55.63,36.07 60.71,43.69 60.71,45.47 54.61,46.99 46.99,46.99 41.91,46.99 43.18,42.42 46.99,42.42 48.51,40.13 48.51,37.08 44.96,30.99 41.91,28.7 56.64,31.75 51.82,42.42 42.42,38.1 48.51,32.77 49.15,29.21
  pour Top (isolate 0.305): 61.72,48.01 61.72,27.69 41.4,27.69 41.4,48.01
  pour Bottom (isolate 0.305): 41.4,48.01 41.4,27.69 61.72,27.69 61.72,48.01
GND4  (via drill 0.51)
  Bottom 0.406: JP5.2 98.04,30.23
  other vias: 116.08,28.7 114.05,37.85 111.51,37.85 116.08,32.26 114.05,35.31 111,36.07 116.08,43.69 116.08,45.47 109.98,46.99 102.36,46.99 97.28,46.99 98.55,42.42 102.36,42.42 103.89,40.13 103.89,37.08 100.33,30.99 97.28,28.7 112.01,31.75 107.19,42.42 97.79,38.1 103.89,32.77 104.52,29.21
  pour Top (isolate 0.305): 117.09,48.01 117.09,27.69 96.77,27.69 96.77,48.01
  pour Bottom (isolate 0.305): 96.77,48.01 96.77,27.69 117.09,27.69 117.09,48.01
GND5  (via drill 0.51)
  Bottom 0.406: JP6.2 153.42,30.23
  other vias: 171.45,28.7 169.42,37.85 166.88,37.85 171.45,32.26 169.42,35.31 166.37,36.07 171.45,43.69 171.45,45.47 165.35,46.99 157.73,46.99 152.65,46.99 153.92,42.42 157.73,42.42 159.26,40.13 159.26,37.08 155.7,30.99 152.65,28.7 167.39,31.75 162.56,42.42 153.16,38.1 159.26,32.77 159.89,29.21
  pour Top (isolate 0.305): 172.47,48.01 172.47,27.69 152.15,27.69 152.15,48.01
  pour Bottom (isolate 0.305): 152.15,48.01 152.15,27.69 172.47,27.69 172.47,48.01
GND6  (via drill 0.51)
  Bottom 0.406: JP7.2 42.67,51.05
  other vias: 60.71,49.53 58.67,58.67 56.13,58.67 60.71,53.09 58.67,56.13 55.63,56.9 60.71,64.52 60.71,66.29 54.61,67.82 46.99,67.82 41.91,67.82 43.18,63.25 46.99,63.25 48.51,60.96 48.51,57.91 44.96,51.82 41.91,49.53 56.64,52.58 51.82,63.25 42.42,58.93 48.51,53.59 49.15,50.04
  pour Top (isolate 0.305): 61.72,68.83 61.72,48.51 41.4,48.51 41.4,68.83
  pour Bottom (isolate 0.305): 41.4,68.83 41.4,48.51 61.72,48.51 61.72,68.83
GND7  (via drill 0.51)
  Bottom 0.406: JP8.2 98.04,51.05
  other vias: 116.08,49.53 114.05,58.67 111.51,58.67 116.08,53.09 114.05,56.13 111,56.9 116.08,64.52 116.08,66.29 109.98,67.82 102.36,67.82 97.28,67.82 98.55,63.25 102.36,63.25 103.89,60.96 103.89,57.91 100.33,51.82 97.28,49.53 112.01,52.58 107.19,63.25 97.79,58.93 103.89,53.59 104.52,50.04
  pour Top (isolate 0.305): 117.09,68.83 117.09,48.51 96.77,48.51 96.77,68.83
  pour Bottom (isolate 0.305): 96.77,68.83 96.77,48.51 117.09,48.51 117.09,68.83
GND8  (via drill 0.51)
  Bottom 0.406: JP9.2 153.42,51.05
  other vias: 171.45,49.53 169.42,58.67 166.88,58.67 171.45,53.09 169.42,56.13 166.37,56.9 171.45,64.52 171.45,66.29 165.35,67.82 157.73,67.82 152.65,67.82 153.92,63.25 157.73,63.25 159.26,60.96 159.26,57.91 155.7,51.82 152.65,49.53 167.39,52.58 162.56,63.25 153.16,58.93 159.26,53.59 159.89,50.04
  pour Top (isolate 0.305): 172.47,68.83 172.47,48.51 152.15,48.51 152.15,68.83
  pour Bottom (isolate 0.305): 152.15,68.83 152.15,48.51 172.47,48.51 172.47,68.83
GND-ISO  (via drill 0.51)
  Bottom 0.406: JP1.1 38.86,9.4
  other vias: 23.11,26.16 23.37,14.48 17.02,19.81 18.16,14.22 23.11,7.87 28.96,7.87 39.37,7.87 29.72,19.81 34.04,24.64 39.62,26.16 29.97,13.21 39.62,22.1 39.62,11.18 17.02,23.88 20.83,19.05 30.73,26.16 35.31,7.87
  pour Bottom (isolate 0.305): 16,27.18 40.13,27.18 40.13,6.86 16,6.86
  pour Top (isolate 0.305): 40.13,27.18 16,27.18 16,6.86 40.13,6.86
GND-ISO1  (via drill 0.51)
  Bottom 0.406: JP2.1 94.23,9.4
  other vias: 78.49,26.16 78.74,14.48 72.39,19.81 73.53,14.22 78.49,7.87 84.33,7.87 94.74,7.87 85.09,19.81 89.41,24.64 95,26.16 85.34,13.21 95,22.1 95,11.18 72.39,23.88 76.2,19.05 86.11,26.16 90.68,7.87
  pour Bottom (isolate 0.305): 71.37,27.18 95.5,27.18 95.5,6.86 71.37,6.86
  pour Top (isolate 0.305): 95.5,27.18 71.37,27.18 71.37,6.86 95.5,6.86
GND-ISO2  (via drill 0.51)
  Bottom 0.406: JP3.1 149.61,9.4
  other vias: 133.86,26.16 134.11,14.48 127.76,19.81 128.91,14.22 133.86,7.87 139.7,7.87 150.11,7.87 140.46,19.81 144.78,24.64 150.37,26.16 140.72,13.21 150.37,22.1 150.37,11.18 127.76,23.88 131.57,19.05 141.48,26.16 146.05,7.87
  pour Bottom (isolate 0.305): 126.75,27.18 150.88,27.18 150.88,6.86 126.75,6.86
  pour Top (isolate 0.305): 150.88,27.18 126.75,27.18 126.75,6.86 150.88,6.86
GND-ISO3  (via drill 0.51)
  Bottom 0.406: JP4.1 38.86,30.23
  other vias: 23.11,46.99 23.37,35.31 17.02,40.64 18.16,35.05 23.11,28.7 28.96,28.7 39.37,28.7 29.72,40.64 34.04,45.47 39.62,46.99 29.97,34.04 39.62,42.93 39.62,32 17.02,44.7 20.83,39.88 30.73,46.99 35.31,28.7
  pour Bottom (isolate 0.305): 16,48.01 40.13,48.01 40.13,27.69 16,27.69
  pour Top (isolate 0.305): 40.13,48.01 16,48.01 16,27.69 40.13,27.69
GND-ISO4  (via drill 0.51)
  Bottom 0.406: JP5.1 94.23,30.23
  other vias: 78.49,46.99 78.74,35.31 72.39,40.64 73.53,35.05 78.49,28.7 84.33,28.7 94.74,28.7 85.09,40.64 89.41,45.47 95,46.99 85.34,34.04 95,42.93 95,32 72.39,44.7 76.2,39.88 86.11,46.99 90.68,28.7
  pour Bottom (isolate 0.305): 71.37,48.01 95.5,48.01 95.5,27.69 71.37,27.69
  pour Top (isolate 0.305): 95.5,48.01 71.37,48.01 71.37,27.69 95.5,27.69
GND-ISO5  (via drill 0.51)
  Bottom 0.406: JP6.1 149.61,30.23
  other vias: 133.86,46.99 134.11,35.31 127.76,40.64 128.91,35.05 133.86,28.7 139.7,28.7 150.11,28.7 140.46,40.64 144.78,45.47 150.37,46.99 140.72,34.04 150.37,42.93 150.37,32 127.76,44.7 131.57,39.88 141.48,46.99 146.05,28.7
  pour Bottom (isolate 0.305): 126.75,48.01 150.88,48.01 150.88,27.69 126.75,27.69
  pour Top (isolate 0.305): 150.88,48.01 126.75,48.01 126.75,27.69 150.88,27.69
GND-ISO6  (via drill 0.51)
  Bottom 0.406: JP7.1 38.86,51.05
  other vias: 23.11,67.82 23.37,56.13 17.02,61.47 18.16,55.88 23.11,49.53 28.96,49.53 39.37,49.53 29.72,61.47 34.04,66.29 39.62,67.82 29.97,54.86 39.62,63.75 39.62,52.83 17.02,65.53 20.83,60.71 30.73,67.82 35.31,49.53
  pour Bottom (isolate 0.305): 16,68.83 40.13,68.83 40.13,48.51 16,48.51
  pour Top (isolate 0.305): 40.13,68.83 16,68.83 16,48.51 40.13,48.51
GND-ISO7  (via drill 0.51)
  Bottom 0.406: JP8.1 94.23,51.05
  other vias: 78.49,67.82 78.74,56.13 72.39,61.47 73.53,55.88 78.49,49.53 84.33,49.53 94.74,49.53 85.09,61.47 89.41,66.29 95,67.82 85.34,54.86 95,63.75 95,52.83 72.39,65.53 76.2,60.71 86.11,67.82 90.68,49.53
  pour Bottom (isolate 0.305): 71.37,68.83 95.5,68.83 95.5,48.51 71.37,48.51
  pour Top (isolate 0.305): 95.5,68.83 71.37,68.83 71.37,48.51 95.5,48.51
GND-ISO8  (via drill 0.51)
  Bottom 0.406: JP9.1 149.61,51.05
  other vias: 133.86,67.82 134.11,56.13 127.76,61.47 128.91,55.88 133.86,49.53 139.7,49.53 150.11,49.53 140.46,61.47 144.78,66.29 150.37,67.82 140.72,54.86 150.37,63.75 150.37,52.83 127.76,65.53 131.57,60.71 141.48,67.82 146.05,49.53
  pour Bottom (isolate 0.305): 126.75,68.83 150.88,68.83 150.88,48.51 126.75,48.51
  pour Top (isolate 0.305): 150.88,68.83 126.75,68.83 126.75,48.51 150.88,48.51
N$1
  Top 0.254: J1.RING 38.79,23.62 R1.1
  Bottom 0.254: J1.RING 26.5,9.74 J7.1
N$2  (via drill 0.51)
  Top 0.254: R1.2 41.4,23.96 C1.1 42.58,20.41 v42.93,20.07 | D3.3 v46.23,15.49 | IC1.2 51.44,14.86 v51.56,14.99
  Bottom 0.254: v51.56,14.99 46.74,14.99 v46.23,15.49 45.72,15.49 42.93,18.29 v42.93,20.07
N$3
  Top 0.254: R2.1 35,9.14 J1.TIP
  Bottom 0.254: J8.1 32.51,9.4 32.77,9.65 32.77,11.3 J1.TIP
N$4  (via drill 0.51)
  Top 0.254: IC1.3 52.7,13.59 v52.83,13.72 | D2.3 46.16,12.45 v43.43,12.45 43.43,11.01 C2.2 43.43,10.83 43.43,9.65 42.93,9.14 R2.2
  Bottom 0.254: v52.83,13.72 52.58,13.46 44.45,13.46 v43.43,12.45
N$5
  Top 0.254: 41.4,16 41.4,13.97 C3.1 41.66,13.97 41.4,13.72 41.4,11.34 C2.1 | 41.4,16 C1.2 | R3.1 41.4,16
N$6  (via drill 0.51)
  Top 0.254: v53.85,14.73 53.98,14.86 IC1.5 53.98,20.95 52.95,21.98 C4.- | R3.2 43.52,15.07 43.18,14.73 v43.18,13.97
  Bottom 0.254: v43.18,13.97 51.82,13.97 52.58,14.73 v53.85,14.73
N$7
  Top 0.254: IC1.8 50.16,19.18 48.15,21.2 C4.+
N$8
  Top 0.254: J1.SLEEVE-NORM 17.27,25.57 J5.1
N$9
  Bottom 0.254: J1.TIP-NORM 32.8,24.35 32.51,24.64 J4.1
N$10
  Bottom 0.254: J1.RING-NORM 26.5,24.3 J3.1
N$11
  Top 0.254: J10.RING 94.16,23.62 R5.1
  Bottom 0.254: J10.RING 81.87,9.74 J15.1
N$12
  Top 0.254: D3.1 D2.1 47.18,11.36 46.99,11.18 46.99,10.03 D1.A
N$13  (via drill 0.51)
  Top 0.254: R5.2 96.77,23.96 C7.1 97.96,20.41 v98.3,20.07 | D5.3 v101.6,15.49 | IC2.2 106.81,14.86 v106.93,14.99
  Bottom 0.254: v106.93,14.99 102.11,14.99 v101.6,15.49 101.09,15.49 98.3,18.29 v98.3,20.07
N$14
  Top 0.254: R4.1 90.37,9.14 J10.TIP
  Bottom 0.254: J16.1 87.88,9.4 88.14,9.65 88.14,11.3 J10.TIP
N$15
  Top 0.254: D2.2 D3.2 45.28,19.75 44.96,20.07 D4.C
N$16  (via drill 0.51)
  Top 0.254: IC2.3 108.08,13.59 v108.2,13.72 | D6.3 101.53,12.45 v98.81,12.45 98.81,11.01 C8.2 98.81,10.83 98.81,9.65 98.3,9.14 R4.2
  Bottom 0.254: v108.2,13.72 107.95,13.46 99.82,13.46 v98.81,12.45
N$17
  Top 0.254: 96.77,16 96.77,13.97 C9.1 97.03,13.97 96.77,13.72 96.77,11.34 C8.1 | 96.77,16 C7.2 | R6.1 96.77,16
N$18  (via drill 0.51)
  Top 0.254: v109.22,14.73 109.35,14.86 IC2.5 109.35,20.95 108.32,21.98 C12.- | R6.2 98.89,15.07 98.55,14.73 v98.55,13.97
  Bottom 0.254: v98.55,13.97 107.19,13.97 107.95,14.73 v109.22,14.73
N$19
  Top 0.254: IC2.8 105.54,19.18 103.52,21.2 C12.+
N$20
  Top 0.254: D5.1 D6.1 102.55,11.36 102.36,11.18 102.36,10.03 D7.A
N$21
  Top 0.254: D6.2 D5.2 100.65,19.75 100.33,20.07 D8.C
N$22
  Top 0.254: J10.SLEEVE-NORM 72.64,25.57 J14.1
N$23
  Bottom 0.254: J10.TIP-NORM 88.17,24.35 87.88,24.64 J13.1
N$24
  Bottom 0.254: J10.RING-NORM 81.87,24.3 J12.1
N$25
  Top 0.254: J19.RING 149.53,23.62 R8.1
  Bottom 0.254: J19.RING 137.25,9.74 J24.1
N$26  (via drill 0.51)
  Top 0.254: R8.2 152.15,23.96 C13.1 153.33,20.41 v153.67,20.07 | D9.3 v156.97,15.49 | IC3.2 162.18,14.86 v162.31,14.99
  Bottom 0.254: v162.31,14.99 157.48,14.99 v156.97,15.49 156.46,15.49 153.67,18.29 v153.67,20.07
N$27
  Top 0.254: R7.1 145.74,9.14 J19.TIP
  Bottom 0.254: J25.1 143.26,9.4 143.51,9.65 143.51,11.3 J19.TIP
N$28  (via drill 0.51)
  Top 0.254: IC3.3 163.45,13.59 v163.58,13.72 | D10.3 156.9,12.45 v154.18,12.45 154.18,11.01 C14.2 154.18,10.83 154.18,9.65 153.67,9.14 R7.2
  Bottom 0.254: v163.58,13.72 163.32,13.46 155.19,13.46 v154.18,12.45
N$29
  Top 0.254: 152.15,16 152.15,13.97 C15.1 152.4,13.97 152.15,13.72 152.15,11.34 C14.1 | 152.15,16 C13.2 | R9.1 152.15,16
N$30  (via drill 0.51)
  Top 0.254: v164.59,14.73 164.72,14.86 IC3.5 164.72,20.95 163.69,21.98 C18.- | R9.2 154.27,15.07 153.92,14.73 v153.92,13.97
  Bottom 0.254: v153.92,13.97 162.56,13.97 163.32,14.73 v164.59,14.73
N$31
  Top 0.254: IC3.8 160.91,19.18 158.89,21.2 C18.+
N$32
  Top 0.254: D9.1 D10.1 157.92,11.36 157.73,11.18 157.73,10.03 D11.A
N$33
  Top 0.254: D10.2 D9.2 156.02,19.75 155.7,20.07 D12.C
N$34
  Top 0.254: J19.SLEEVE-NORM 128.02,25.57 J23.1
N$35
  Bottom 0.254: J19.TIP-NORM 143.55,24.35 143.26,24.64 J22.1
N$36
  Bottom 0.254: J19.RING-NORM 137.25,24.3 J21.1
N$37
  Top 0.254: J28.RING 38.79,44.45 R11.1
  Bottom 0.254: J28.RING 26.5,30.57 J33.1
N$38  (via drill 0.51)
  Top 0.254: R11.2 41.4,44.79 C19.1 42.58,41.24 v42.93,40.89 | D13.3 v46.23,36.32 | IC4.2 51.44,35.69 v51.56,35.81
  Bottom 0.254: v51.56,35.81 46.74,35.81 v46.23,36.32 45.72,36.32 42.93,39.12 v42.93,40.89
N$39
  Top 0.254: R10.1 35,29.97 J28.TIP
  Bottom 0.254: J34.1 32.51,30.23 32.77,30.48 32.77,32.13 J28.TIP
N$40  (via drill 0.51)
  Top 0.254: IC4.3 52.7,34.42 v52.83,34.54 | D14.3 46.16,33.27 v43.43,33.27 43.43,31.84 C20.2 43.43,31.66 43.43,30.48 42.93,29.97 R10.2
  Bottom 0.254: v52.83,34.54 52.58,34.29 44.45,34.29 v43.43,33.27
N$41
  Top 0.254: 41.4,36.83 41.4,34.8 C21.1 41.66,34.8 41.4,34.54 41.4,32.17 C20.1 | 41.4,36.83 C19.2 | R12.1 41.4,36.83
N$42  (via drill 0.51)
  Top 0.254: v53.85,35.56 53.98,35.69 IC4.5 53.98,41.78 52.95,42.81 C24.- | R12.2 43.52,35.9 43.18,35.56 v43.18,34.8
  Bottom 0.254: v43.18,34.8 51.82,34.8 52.58,35.56 v53.85,35.56
N$43
  Top 0.254: IC4.8 50.16,40.01 48.15,42.02 C24.+
N$44
  Top 0.254: D13.1 D14.1 47.18,32.19 46.99,32 46.99,30.85 D15.A
N$45
  Top 0.254: D14.2 D13.2 45.28,40.57 44.96,40.89 D16.C
N$46
  Top 0.254: J28.SLEEVE-NORM 17.27,46.4 J32.1
N$47
  Bottom 0.254: J28.TIP-NORM 32.8,45.18 32.51,45.47 J31.1
N$48
  Bottom 0.254: J28.RING-NORM 26.5,45.13 J30.1
N$49
  Top 0.254: J37.RING 94.16,44.45 R14.1
  Bottom 0.254: J37.RING 81.87,30.57 J42.1
N$50  (via drill 0.51)
  Top 0.254: R14.2 96.77,44.79 C25.1 97.96,41.24 v98.3,40.89 | D17.3 v101.6,36.32 | IC5.2 106.81,35.69 v106.93,35.81
  Bottom 0.254: v106.93,35.81 102.11,35.81 v101.6,36.32 101.09,36.32 98.3,39.12 v98.3,40.89
N$51
  Top 0.254: R13.1 90.37,29.97 J37.TIP
  Bottom 0.254: J43.1 87.88,30.23 88.14,30.48 88.14,32.13 J37.TIP
N$52  (via drill 0.51)
  Top 0.254: IC5.3 108.08,34.42 v108.2,34.54 | D18.3 101.53,33.27 v98.81,33.27 98.81,31.84 C26.2 98.81,31.66 98.81,30.48 98.3,29.97 R13.2
  Bottom 0.254: v108.2,34.54 107.95,34.29 99.82,34.29 v98.81,33.27
N$53
  Top 0.254: 96.77,36.83 96.77,34.8 C27.1 97.03,34.8 96.77,34.54 96.77,32.17 C26.1 | 96.77,36.83 C25.2 | R15.1 96.77,36.83
N$54  (via drill 0.51)
  Top 0.254: v109.22,35.56 109.35,35.69 IC5.5 109.35,41.78 108.32,42.81 C30.- | R15.2 98.89,35.9 98.55,35.56 v98.55,34.8
  Bottom 0.254: v98.55,34.8 107.19,34.8 107.95,35.56 v109.22,35.56
N$55
  Top 0.254: IC5.8 105.54,40.01 103.52,42.02 C30.+
N$56
  Top 0.254: D17.1 D18.1 102.55,32.19 102.36,32 102.36,30.85 D19.A
N$57
  Top 0.254: D18.2 D17.2 100.65,40.57 100.33,40.89 D20.C
N$58
  Top 0.254: J37.SLEEVE-NORM 72.64,46.4 J41.1
N$59
  Bottom 0.254: J37.TIP-NORM 88.17,45.18 87.88,45.47 J40.1
N$60
  Bottom 0.254: J37.RING-NORM 81.87,45.13 J39.1
N$61
  Top 0.254: J46.RING 149.53,44.45 R17.1
  Bottom 0.254: J46.RING 137.25,30.57 J51.1
N$62  (via drill 0.51)
  Top 0.254: R17.2 152.15,44.79 C31.1 153.33,41.24 v153.67,40.89 | D21.3 v156.97,36.32 | IC6.2 162.18,35.69 v162.31,35.81
  Bottom 0.254: v162.31,35.81 157.48,35.81 v156.97,36.32 156.46,36.32 153.67,39.12 v153.67,40.89
N$63
  Top 0.254: R16.1 145.74,29.97 J46.TIP
  Bottom 0.254: J52.1 143.26,30.23 143.51,30.48 143.51,32.13 J46.TIP
N$64  (via drill 0.51)
  Top 0.254: IC6.3 163.45,34.42 v163.58,34.54 | D22.3 156.9,33.27 v154.18,33.27 154.18,31.84 C32.2 154.18,31.66 154.18,30.48 153.67,29.97 R16.2
  Bottom 0.254: v163.58,34.54 163.32,34.29 155.19,34.29 v154.18,33.27
N$65
  Top 0.254: 152.15,36.83 152.15,34.8 C33.1 152.4,34.8 152.15,34.54 152.15,32.17 C32.1 | 152.15,36.83 C31.2 | R18.1 152.15,36.83
N$66  (via drill 0.51)
  Top 0.254: v164.59,35.56 164.72,35.69 IC6.5 164.72,41.78 163.69,42.81 C36.- | R18.2 154.27,35.9 153.92,35.56 v153.92,34.8
  Bottom 0.254: v153.92,34.8 162.56,34.8 163.32,35.56 v164.59,35.56
N$67
  Top 0.254: IC6.8 160.91,40.01 158.89,42.02 C36.+
N$68
  Top 0.254: D21.1 D22.1 157.92,32.19 157.73,32 157.73,30.85 D23.A
N$69
  Top 0.254: D22.2 D21.2 156.02,40.57 155.7,40.89 D24.C
N$70
  Top 0.254: J46.SLEEVE-NORM 128.02,46.4 J50.1
N$71
  Bottom 0.254: J46.TIP-NORM 143.55,45.18 143.26,45.47 J49.1
N$72
  Bottom 0.254: J46.RING-NORM 137.25,45.13 J48.1
N$73
  Top 0.254: J55.RING 38.79,65.28 R20.1
  Bottom 0.254: J55.RING 26.5,51.39 J60.1
N$74  (via drill 0.51)
  Top 0.254: R20.2 41.4,65.62 C37.1 42.58,62.06 v42.93,61.72 | D25.3 v46.23,57.15 | IC7.2 51.44,56.52 v51.56,56.64
  Bottom 0.254: v51.56,56.64 46.74,56.64 v46.23,57.15 45.72,57.15 42.93,59.94 v42.93,61.72
N$75
  Top 0.254: R19.1 35,50.8 J55.TIP
  Bottom 0.254: J61.1 32.51,51.05 32.77,51.31 32.77,52.96 J55.TIP
N$76  (via drill 0.51)
  Top 0.254: IC7.3 52.7,55.24 v52.83,55.37 | D26.3 46.16,54.1 v43.43,54.1 43.43,52.67 C38.2 43.43,52.49 43.43,51.31 42.93,50.8 R19.2
  Bottom 0.254: v52.83,55.37 52.58,55.12 44.45,55.12 v43.43,54.1
N$77
  Top 0.254: 41.4,57.66 41.4,55.63 C39.1 41.66,55.63 41.4,55.37 41.4,53 C38.1 | 41.4,57.66 C37.2 | R21.1 41.4,57.66
N$78  (via drill 0.51)
  Top 0.254: v53.85,56.39 53.98,56.52 IC7.5 53.98,62.61 52.95,63.64 C42.- | R21.2 43.52,56.73 43.18,56.39 v43.18,55.63
  Bottom 0.254: v43.18,55.63 51.82,55.63 52.58,56.39 v53.85,56.39
N$79
  Top 0.254: IC7.8 50.16,60.83 48.15,62.85 C42.+
N$80
  Top 0.254: D25.1 D26.1 47.18,53.02 46.99,52.83 46.99,51.68 D27.A
N$81
  Top 0.254: D26.2 D25.2 45.28,61.4 44.96,61.72 D28.C
N$82
  Top 0.254: J55.SLEEVE-NORM 17.27,67.22 J59.1
N$83
  Bottom 0.254: J55.TIP-NORM 32.8,66 32.51,66.29 J58.1
N$84
  Bottom 0.254: J55.RING-NORM 26.5,65.95 J57.1
N$85
  Top 0.254: J64.RING 94.16,65.28 R23.1
  Bottom 0.254: J64.RING 81.87,51.39 J69.1
N$86  (via drill 0.51)
  Top 0.254: R23.2 96.77,65.62 C43.1 97.96,62.06 v98.3,61.72 | D29.3 v101.6,57.15 | IC8.2 106.81,56.52 v106.93,56.64
  Bottom 0.254: v106.93,56.64 102.11,56.64 v101.6,57.15 101.09,57.15 98.3,59.94 v98.3,61.72
N$87
  Top 0.254: R22.1 90.37,50.8 J64.TIP
  Bottom 0.254: J70.1 87.88,51.05 88.14,51.31 88.14,52.96 J64.TIP
N$88  (via drill 0.51)
  Top 0.254: IC8.3 108.08,55.24 v108.2,55.37 | D30.3 101.53,54.1 v98.81,54.1 98.81,52.67 C44.2 98.81,52.49 98.81,51.31 98.3,50.8 R22.2
  Bottom 0.254: v108.2,55.37 107.95,55.12 99.82,55.12 v98.81,54.1
N$89
  Top 0.254: 96.77,57.66 96.77,55.63 C45.1 97.03,55.63 96.77,55.37 96.77,53 C44.1 | 96.77,57.66 C43.2 | R24.1 96.77,57.66
N$90  (via drill 0.51)
  Top 0.254: v109.22,56.39 109.35,56.52 IC8.5 109.35,62.61 108.32,63.64 C48.- | R24.2 98.89,56.73 98.55,56.39 v98.55,55.63
  Bottom 0.254: v98.55,55.63 107.19,55.63 107.95,56.39 v109.22,56.39
N$91
  Top 0.254: IC8.8 105.54,60.83 103.52,62.85 C48.+
N$92
  Top 0.254: D29.1 D30.1 102.55,53.02 102.36,52.83 102.36,51.68 D31.A
N$93
  Top 0.254: D30.2 D29.2 100.65,61.4 100.33,61.72 D32.C
N$94
  Top 0.254: J64.SLEEVE-NORM 72.64,67.22 J68.1
N$95
  Bottom 0.254: J64.TIP-NORM 88.17,66 87.88,66.29 J67.1
N$96
  Bottom 0.254: J64.RING-NORM 81.87,65.95 J66.1
N$97
  Top 0.254: J73.RING 149.53,65.28 R26.1
  Bottom 0.254: J73.RING 137.25,51.39 J78.1
N$98  (via drill 0.51)
  Top 0.254: R26.2 152.15,65.62 C49.1 153.33,62.06 v153.67,61.72 | D33.3 v156.97,57.15 | IC9.2 162.18,56.52 v162.31,56.64
  Bottom 0.254: v162.31,56.64 157.48,56.64 v156.97,57.15 156.46,57.15 153.67,59.94 v153.67,61.72
N$99
  Top 0.254: R25.1 145.74,50.8 J73.TIP
  Bottom 0.254: J79.1 143.26,51.05 143.51,51.31 143.51,52.96 J73.TIP
N$100  (via drill 0.51)
  Top 0.254: IC9.3 163.45,55.24 v163.58,55.37 | D34.3 156.9,54.1 v154.18,54.1 154.18,52.67 C50.2 154.18,52.49 154.18,51.31 153.67,50.8 R25.2
  Bottom 0.254: v163.58,55.37 163.32,55.12 155.19,55.12 v154.18,54.1
N$101
  Top 0.254: 152.15,57.66 152.15,55.63 C51.1 152.4,55.63 152.15,55.37 152.15,53 C50.1 | 152.15,57.66 C49.2 | R27.1 152.15,57.66
N$102  (via drill 0.51)
  Top 0.254: v164.59,56.39 164.72,56.52 IC9.5 164.72,62.61 163.69,63.64 C54.- | R27.2 154.27,56.73 153.92,56.39 v153.92,55.63
  Bottom 0.254: v153.92,55.63 162.56,55.63 163.32,56.39 v164.59,56.39
N$103
  Top 0.254: IC9.8 160.91,60.83 158.89,62.85 C54.+
N$104
  Top 0.254: D33.1 D34.1 157.92,53.02 157.73,52.83 157.73,51.68 D35.A
N$105
  Top 0.254: D34.2 D33.2 156.02,61.4 155.7,61.72 D36.C
N$106
  Top 0.254: J73.SLEEVE-NORM 128.02,67.22 J77.1
N$107
  Bottom 0.254: J73.TIP-NORM 143.55,66 143.26,66.29 J76.1
N$108
  Bottom 0.254: J73.RING-NORM 137.25,65.95 J75.1
RCV  (via drill 0.51)
  Top 0.254: IC1.6 52.7,18.67 v53.09,19.05
  Bottom 0.254: v53.09,19.05 54.86,19.05 55.12,18.8 55.63,18.8 55.88,19.05 57.15,19.05 58.93,20.83 J6.4
RCV1  (via drill 0.51)
  Top 0.254: IC2.6 108.08,18.67 v108.46,19.05
  Bottom 0.254: v108.46,19.05 110.24,19.05 110.49,18.8 111,18.8 111.25,19.05 112.52,19.05 114.3,20.83 J11.4
RCV2  (via drill 0.51)
  Top 0.254: IC3.6 163.45,18.67 v163.83,19.05
  Bottom 0.254: v163.83,19.05 165.61,19.05 165.86,18.8 166.37,18.8 166.62,19.05 167.89,19.05 169.67,20.83 J20.4
RCV3  (via drill 0.51)
  Top 0.254: IC4.6 52.7,39.5 v53.09,39.88
  Bottom 0.254: v53.09,39.88 54.86,39.88 55.12,39.62 55.63,39.62 55.88,39.88 57.15,39.88 58.93,41.66 J29.4
RCV4  (via drill 0.51)
  Top 0.254: IC5.6 108.08,39.5 v108.46,39.88
  Bottom 0.254: v108.46,39.88 110.24,39.88 110.49,39.62 111,39.62 111.25,39.88 112.52,39.88 114.3,41.66 J38.4
RCV5  (via drill 0.51)
  Top 0.254: IC6.6 163.45,39.5 v163.83,39.88
  Bottom 0.254: v163.83,39.88 165.61,39.88 165.86,39.62 166.37,39.62 166.62,39.88 167.89,39.88 169.67,41.66 J47.4
RCV6  (via drill 0.51)
  Top 0.254: IC7.6 52.7,60.33 v53.09,60.71
  Bottom 0.254: v53.09,60.71 54.86,60.71 55.12,60.45 55.63,60.45 55.88,60.71 57.15,60.71 58.93,62.48 J56.4
RCV7  (via drill 0.51)
  Top 0.254: IC8.6 108.08,60.33 v108.46,60.71
  Bottom 0.254: v108.46,60.71 110.24,60.71 110.49,60.45 111,60.45 111.25,60.71 112.52,60.71 114.3,62.48 J65.4
RCV8  (via drill 0.51)
  Top 0.254: IC9.6 163.45,60.33 v163.83,60.71
  Bottom 0.254: v163.83,60.71 165.61,60.71 165.86,60.45 166.37,60.45 166.62,60.71 167.89,60.71 169.67,62.48 J74.4
VCC  (via drill 0.51)
  Top 0.406: J6.3 56.9,18.29 v55.37,19.81 | IC1.7 51.44,19.94 v51.31,20.07 | C5.1 45.05,24.3 v45.21,24.13 44.96,23.88 D4.A
  Bottom 0.406: v55.37,19.81 54.1,19.81 53.85,20.07 v51.31,20.07 47.24,24.13 v45.21,24.13
VCC1  (via drill 0.51)
  Top 0.406: J11.3 112.27,18.29 v110.74,19.81 | IC2.7 106.81,19.94 v106.68,20.07 | C10.1 100.42,24.3 v100.58,24.13 100.33,23.88 D8.A
  Bottom 0.406: v110.74,19.81 109.47,19.81 109.22,20.07 v106.68,20.07 102.62,24.13 v100.58,24.13
VCC2  (via drill 0.51)
  Top 0.406: J20.3 167.64,18.29 v166.12,19.81 | IC3.7 162.18,19.94 v162.05,20.07 | C16.1 155.79,24.3 v155.96,24.13 155.7,23.88 D12.A
  Bottom 0.406: v166.12,19.81 164.85,19.81 164.59,20.07 v162.05,20.07 157.99,24.13 v155.96,24.13
VCC3  (via drill 0.51)
  Top 0.406: J29.3 56.9,39.12 v55.37,40.64 | IC4.7 51.44,40.77 v51.31,40.89 | C22.1 45.05,45.12 v45.21,44.96 44.96,44.7 D16.A
  Bottom 0.406: v55.37,40.64 54.1,40.64 53.85,40.89 v51.31,40.89 47.24,44.96 v45.21,44.96
VCC4  (via drill 0.51)
  Top 0.406: J38.3 112.27,39.12 v110.74,40.64 | IC5.7 106.81,40.77 v106.68,40.89 | C28.1 100.42,45.12 v100.58,44.96 100.33,44.7 D20.A
  Bottom 0.406: v110.74,40.64 109.47,40.64 109.22,40.89 v106.68,40.89 102.62,44.96 v100.58,44.96
VCC5  (via drill 0.51)
  Top 0.406: J47.3 167.64,39.12 v166.12,40.64 | IC6.7 162.18,40.77 v162.05,40.89 | C34.1 155.79,45.12 v155.96,44.96 155.7,44.7 D24.A
  Bottom 0.406: v166.12,40.64 164.85,40.64 164.59,40.89 v162.05,40.89 157.99,44.96 v155.96,44.96
VCC6  (via drill 0.51)
  Top 0.406: J56.3 56.9,59.94 v55.37,61.47 | IC7.7 51.44,61.59 v51.31,61.72 | C40.1 45.05,65.95 v45.21,65.79 44.96,65.53 D28.A
  Bottom 0.406: v55.37,61.47 54.1,61.47 53.85,61.72 v51.31,61.72 47.24,65.79 v45.21,65.79
VCC7  (via drill 0.51)
  Top 0.406: J65.3 112.27,59.94 v110.74,61.47 | IC8.7 106.81,61.59 v106.68,61.72 | C46.1 100.42,65.95 v100.58,65.79 100.33,65.53 D32.A
  Bottom 0.406: v110.74,61.47 109.47,61.47 109.22,61.72 v106.68,61.72 102.62,65.79 v100.58,65.79
VCC8  (via drill 0.51)
  Top 0.406: J74.3 167.64,59.94 v166.12,61.47 | IC9.7 162.18,61.59 v162.05,61.72 | C52.1 155.79,65.95 v155.96,65.79 155.7,65.53 D36.A
  Bottom 0.406: v166.12,61.47 164.85,61.47 164.59,61.72 v162.05,61.72 157.99,65.79 v155.96,65.79
VNEG
  Top 0.406: J6.2 57.91,15.75 55.37,13.21 55.37,9.56 C6.1 54.1,9.4 | D1.C 53.09,9.91 53.59,9.4 54.1,9.4 | IC1.4 53.98,9.53 54.1,9.4
VNEG1
  Top 0.406: J11.2 113.28,15.75 110.74,13.21 110.74,9.56 C11.1 109.47,9.4 | D7.C 108.46,9.91 108.97,9.4 109.47,9.4 | IC2.4 109.35,9.53 109.47,9.4
VNEG2
  Top 0.406: J20.2 168.66,15.75 166.12,13.21 166.12,9.56 C17.1 164.85,9.4 | D11.C 163.83,9.91 164.34,9.4 164.85,9.4 | IC3.4 164.72,9.53 164.85,9.4
VNEG3
  Top 0.406: J29.2 57.91,36.58 55.37,34.04 55.37,30.39 C23.1 54.1,30.23 | D15.C 53.09,30.73 53.59,30.23 54.1,30.23 | IC4.4 53.98,30.35 54.1,30.23
VNEG4
  Top 0.406: J38.2 113.28,36.58 110.74,34.04 110.74,30.39 C29.1 109.47,30.23 | D19.C 108.46,30.73 108.97,30.23 109.47,30.23 | IC5.4 109.35,30.35 109.47,30.23
VNEG5
  Top 0.406: J47.2 168.66,36.58 166.12,34.04 166.12,30.39 C35.1 164.85,30.23 | D23.C 163.83,30.73 164.34,30.23 164.85,30.23 | IC6.4 164.72,30.35 164.85,30.23
VNEG6
  Top 0.406: J56.2 57.91,57.4 55.37,54.86 55.37,51.22 C41.1 54.1,51.05 | D27.C 53.09,51.56 53.59,51.05 54.1,51.05 | IC7.4 53.98,51.18 54.1,51.05
VNEG7
  Top 0.406: J65.2 113.28,57.4 110.74,54.86 110.74,51.22 C47.1 109.47,51.05 | D31.C 108.46,51.56 108.97,51.05 109.47,51.05 | IC8.4 109.35,51.18 109.47,51.05
VNEG8
  Top 0.406: J74.2 168.66,57.4 166.12,54.86 166.12,51.22 C53.1 164.85,51.05 | D35.C 163.83,51.56 164.34,51.05 164.85,51.05 | IC9.4 164.72,51.18 164.85,51.05

## Text on the board
Bottom: V10 | V10 | V10 | V10 | V10 | V10 | V10 | V10 | V10
tPlace: SN | RN | TN | SN | RN | TN | SN | RN | TN | OUT | OUT | OUT | V+ | V+ | V+ | V- | V- | V- | GND | GND | GND | S | R | T | S | R | T | S | R | T | THAT 1206 | THAT 1206 | THAT 1206 | SN | RN | TN | SN | RN | TN | SN | RN | TN | OUT | OUT | OUT | V+ | V+ | V+ | V- | V- | V- | GND | GND | GND | S | R | T | S | R | T | S | R | T | THAT 1206 | THAT 1206 | THAT 1206 | SN | RN | TN | SN | RN | TN | SN | RN | TN | OUT | OUT | OUT | V+ | V+ | V+ | V- | V- | V- | GND | GND | GND | S | R | T | S | R | T | S | R | T | THAT 1206 | THAT 1206 | THAT 1206
bPlace: SN | RN | TN | SN | RN | TN | SN | RN | TN | OUT | OUT | OUT | V+ | V+ | V+ | THAT 1206 / InGenius / Line Receiver / Breakout | THAT 1206 / InGenius / Line Receiver / Breakout | THAT 1206 / InGenius / Line Receiver / Breakout | V- | V- | V- | GND | GND | GND | Chassis | Chassis | Chassis | S | R | T | S | R | T | S | R | T | Cut jumper to / isolate chassis / and circuit grounds | Cut jumper to / isolate chassis / and circuit grounds | Cut jumper to / isolate chassis / and circuit grounds | SN | RN | TN | SN | RN | TN | SN | RN | TN | OUT | OUT | OUT | V+ | V+ | V+ | THAT 1206 / InGenius / Line Receiver / Breakout | THAT 1206 / InGenius / Line Receiver / Breakout | THAT 1206 / InGenius / Line Receiver / Breakout | V- | V- | V- | GND | GND | GND | Chassis | Chassis | Chassis | S | R | T | S | R | T | S | R | T | Cut jumper to / isolate chassis / and circuit grounds | Cut jumper to / isolate chassis / and circuit grounds | Cut jumper to / isolate chassis / and circuit grounds | SN | RN | TN | SN | RN | TN | SN | RN | TN | OUT | OUT | OUT | V+ | V+ | V+ | THAT 1206 / InGenius / Line Receiver / Breakout | THAT 1206 / InGenius / Line Receiver / Breakout | THAT 1206 / InGenius / Line Receiver / Breakout | V- | V- | V- | GND | GND | GND | Chassis | Chassis | Chassis | S | R | T | S | R | T | S | R | T | Cut jumper to / isolate chassis / and circuit grounds | Cut jumper to / isolate chassis / and circuit grounds | Cut jumper to / isolate chassis / and circuit grounds